# Altium PCB PCB1.PcbDoc
Units mm, origin at the board's own origin, x right, y up, seen from the top; angles counter-clockwise.
Board outline 87.63 x 54.23 mm, 2 copper layers (Top Layer, Bottom Layer); 26 components, 14 nets, 70 pads, 0 vias.
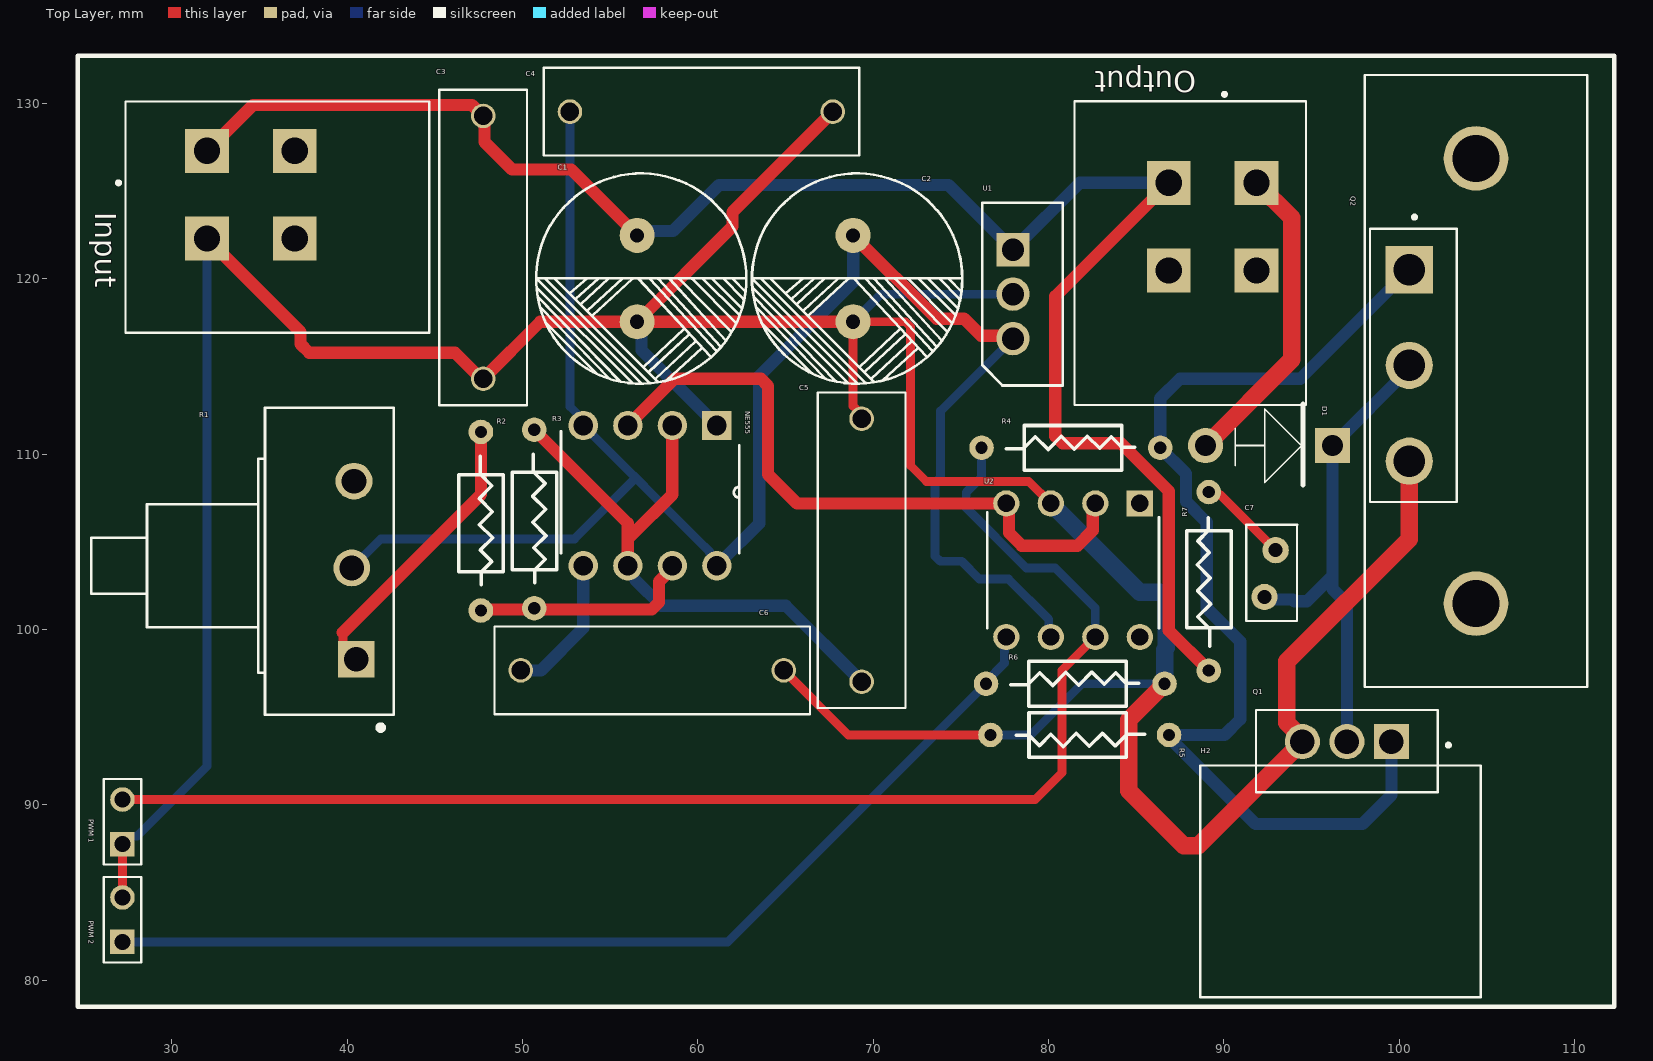
[diagram p0: Top Layer view]
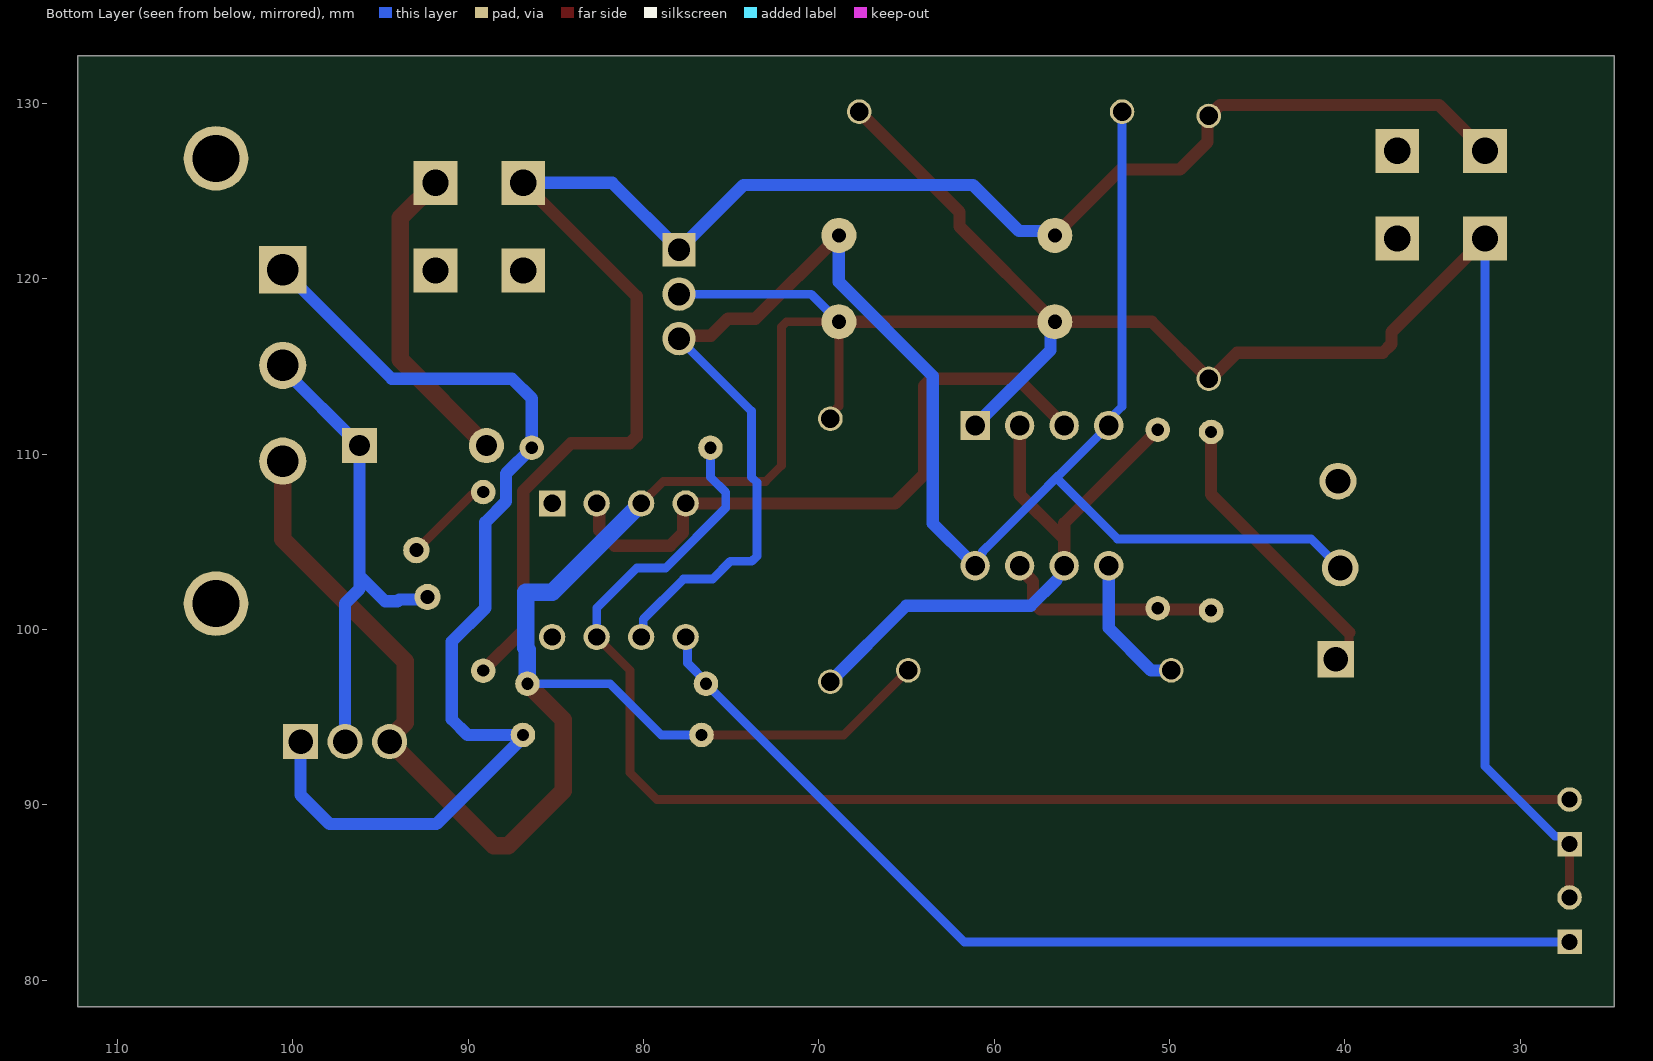
[diagram p1: Bottom Layer view, seen from below]
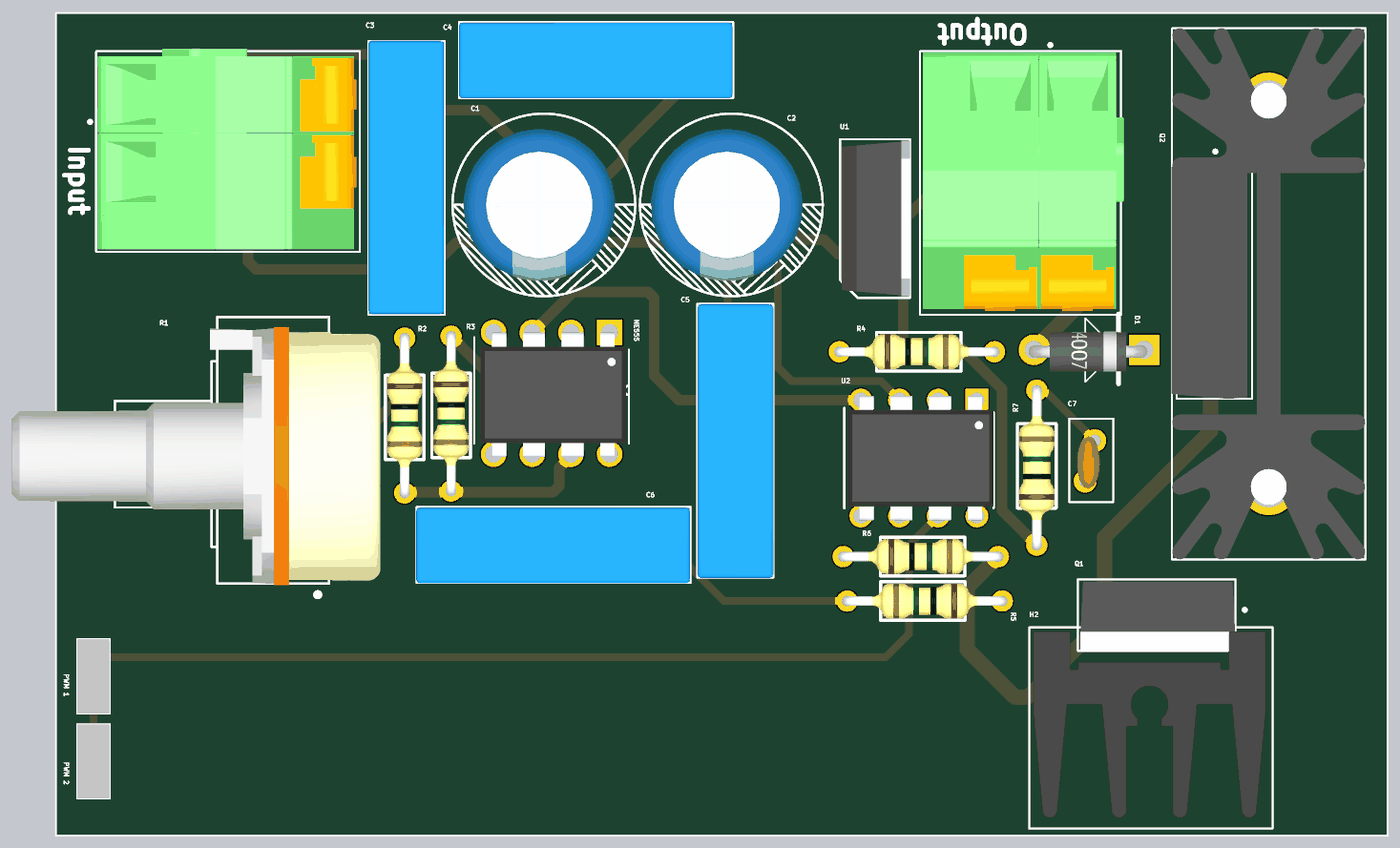
[diagram p2: 3D render of the assembled board from above, using the file's embedded part models]

## Layer stack, top to bottom
Top Solder: solder mask 0.0102, Solder Resist, Dk 3.5
Top Layer: signal copper 0.0356
Dielectric 1: dielectric 0.32, FR-4, Dk 4.8
Bottom Layer: signal copper 0.0356
Bottom Solder: solder mask 0.0102, Solder Resist, Dk 3.5

## Board outline
24.638,78.486 112.268,78.486 112.268,132.715 24.638,132.715

## Design rules (kind name [scope] priority, off if disabled: settings)
Clearance [All] p1: gap=0.254 ignorepadtopadclearanceinfootprint=FALSE except(0: Arc-Hole Track-Hole SMDPad-Hole THPad-Hole Via-Hole Fill-Hole Poly-Hole Region-Hole Text-Hole)
Height [All] p1: minheight=0 maxheight=40 prefheight=12.7
HoleSize [All] p1: absolutevalues=TRUE maxlimit=4 minlimit=0.025 maxpercent=80.000 minpercent=20.000
PolygonConnect [All] p1: connectstyle=Relief reliefconductorwidth=0.254 reliefentries=4 polygonreliefangle="90 Angle" airgapwidth=0.254
RoutingVias [All] p1: holewidth=0.711 width=1.27 viastyle="Through Hole" minholewidth=0.711 minwidth=1.27 maxholewidth=0.711 maxwidth=1.27
SilkToSilkClearance [All] p1: silktosilkclearance=0.1
SilkToSolderMaskClearance [IsPad] p1: minsilkscreentomaskgap=0.1 clearancetoexposedcopper=TRUE
SolderMaskExpansion [All] p1: expansion=0.102 istentingtop=FALSE
Width [All] p1: maxlimit=1 minlimit=0.254 preferedwidth=0.5
26 further rules are at their usual default settings.

## Components (designator, comment, footprint, x,y, rotation, side; value= is the part's Value field where it differs from the comment)
C1 "(DIGIKEY Part Number)" "Capacitor Aluminum Electrolytic DIP 10*13*5" 56.769,120.015 r270 top value="?uF, ?V"
C2 "(DIGIKEY Part Number)" "Capacitor Aluminum Electrolytic DIP 10*13*5" 69.088,120.015 r270 top value="?uF, ?V"
C3 "(DIGIKEY Part Number)" "Capacitor Film DIP 01" 47.752,121.793 r90 top value="?uF, ?V"
C4 "(DIGIKEY Part Number)" "Capacitor Film DIP 01" 60.205,129.54 r180 top value="?uF, ?V"
C5 "(DIGIKEY Part Number)" "Capacitor Film DIP 01" 69.342,104.521 r270 top value="10 nF, 630V"
C6 "(DIGIKEY Part Number)" "Capacitor Film DIP 01" 57.404,97.663 r180 top value="1nF, 50V"
C7 "(DIGIKEY Part Number)" "Capacitor Ceramic Lens DIP" 92.647,103.188 r270 top value="?uF, ?V"
D1 "(DIGIKEY Part Number)" "Diode DIP DO-41 01" 92.583,110.49 r0 top
H1 "(DIGIKEY Part Number)" "HEATSINK 02" 104.394,114.173 r90 top
H2 "(DIGIKEY Part Number)" "HEATSINK 05" 89.535,90.17 r0 top
Input "(DIGIKEY Part Number)" "Phoenix Contact 2x2 Male Straight"#1 35.829,121.626 r180 top
NE555 "NE555N" "NE555 DIP-8" 61.087,111.633 r270 top
Output "(DIGIKEY Part Number)" "Phoenix Contact 2x2 Male Straight"#2 86.193,121.651 r90 top
"PWM 1" "(DIGIKEY Part Number)" "Header 01 1x2" 27.178,89.027 r180 top
"PWM 2" "(DIGIKEY Part Number)" "Header 01 1x2" 27.178,83.439 r180 top
Q1 "(DIGIKEY Part Number)" "MOSFET DIP TO-220" 97.028,93.599 r180 top
Q2 "(DIGIKEY Part Number)" "MOSFET DIP TO-247" 100.584,120.522 r270 top
R1 "(DIGIKEY Part Number)" "Resistor Variable DIP 03" 40.513,104.648 r90 top value=20K
R2 "(DIGIKEY Part Number)" "Resistor DIP 0.25W 01" 47.625,106.172 r270 top value="1 K"
R3 "(DIGIKEY Part Number)" "Resistor DIP 0.25W 01" 50.673,106.299 r270 top value="1 K"
R4 "(DIGIKEY Part Number)" "Resistor DIP 0.25W 01" 81.28,110.363 r0 top value=10
R5 "(DIGIKEY Part Number)" "Resistor DIP 0.25W 01" 81.788,93.98 r180 top value="10 K"
R6 "(DIGIKEY Part Number)" "Resistor DIP 0.25W 01" 81.534,96.901 r0 top value=10
R7 "(DIGIKEY Part Number)" "Resistor DIP 0.25W 01" 89.154,102.743 r90 top value="10 K"
U1 "(DIGIKEY Part Number)" "Linear Regulator DIP TO-220-3" 79.07,116.586 r270 top
U2 "TC4428AEPA-ND" "Gate Driver TC4428AEPA DIP 01" 77.597,99.568 r270 top

## Footprints (in the part's own frame and the unit in brackets; to place one, negate y for a bottom-side part, rotate by r counter-clockwise, add the part's x,y. Pads: shape width x height; smd on the part's side, far side on the other; paste and mask are expansions set on the pad)
"Capacitor Aluminum Electrolytic DIP 10*13*5" [mm]
  round 2 hole 0.8: 1(-2.464,-0.229) 2(2.464,-0.229)
  silkscreen extent -6,-6 6,6, body extent -5,-5.3 5,4.7, height 13
"Capacitor Ceramic Lens DIP" [mm]
  round 1.5 hole 0.8: 1(-1.333,0.317) 2(1.333,-0.317)
  silkscreen extent -2.79,-1.36 2.71,1.54, body extent -1.66,-0.85 1.84,0.65, height 4.5
"Capacitor Film DIP 01" [mm]
  round 1.4 hole 1.05: 1(-7.5,0) 2(7.5,0)
  silkscreen extent -9,-2.5 9,2.5, body extent -8.98,-2.48 9.02,2.52, height 10.5
"Diode DIP DO-41 01" [mm]
  round 2 hole 1.2: 1(-3.619,0)
  rect 2x2 hole 1.2: 2(3.619,0)
  silkscreen extent -1.92,-2.24 1.94,2.36, body extent -3.96,-1.43 3.84,1.19, height 3.81
"Gate Driver TC4428AEPA DIP 01" [mil]
  rect 59x59 hole 39: 1(-300,300)
  round 59 hole 39: 2(-300,200) 3(-300,100) 4(-300,0) 5(0,0) 6(0,100) 7(0,200) 8(0,300)
  silkscreen extent -280,-43 -20,343, body extent -311,-34 12,343, height 200
"Header 01 1x2" [mm]
  rect 1.398x1.398 hole 0.89: 1(0,1.27)
  round 1.398 hole 0.89: 2(0,-1.27)
  silkscreen extent -1.07,-2.44 1.07,2.44, body extent -1.07,-2.44 1.06,2.44, height 11.08
"HEATSINK 02" [mm]
  round 3.686 hole 2.67: 1(-12.7,0) 2(12.7,0)
  silkscreen extent -17.46,-6.35 17.46,6.35, body extent -17.46,-6.35 17.46,6.35, height 38.1
"HEATSINK 05" [mm]
  silkscreen extent -0.87,-11.15 15.12,2.07, body extent -0.63,-10.45 14.67,1.81, height 25
"Linear Regulator DIP TO-220-3" [mil]
  rect 75x75 hole 50: 1(-200,-43)
  round 75 hole 50: 2(-100,-43) 3(0,-43)
  silkscreen extent -305,-112 105,69, body extent -301,-108 101,69, height 775
"MOSFET DIP TO-220" [mm]
  rect 2x2 hole 1.4: 1(-2.54,0)
  round 2 hole 1.4: 2(0,0) 3(2.54,0)
  silkscreen extent -5.89,-1.81 5.18,2.89, body extent -5.16,-1.63 5,2.92, height 19.65
"MOSFET DIP TO-247" [mm]
  rect 2.69x2.69 hole 1.79: 1(0,0)
  round 2.69 hole 1.79: 2(5.46,0) 3(10.92,0)
  silkscreen extent -3.1,-2.23 13.25,2.71, body extent -2.34,-2.59 13.26,2.41, height 30.1
"NE555 DIP-8" [mil]
  rect 66x66 / inner round 66 / far side rect 66x66 hole 44: 1(0,0)
  round 66 hole 44: 2(0,-100) 3(0,-200) 4(0,-300) 5(314.96,-300) 6(314.96,-200) 7(314.96,-100) 8(314.96,0)
  silkscreen extent 13,-350 287,50, body extent 0,-334 323,43, height 200
"Phoenix Contact 2x2 Male Straight"#1 [mm]
  rect 2.5x2.5 hole 1.5: 1(-1.175,-5.675) 1(3.825,-5.675) 2(-1.175,-0.675) 2(3.825,-0.675)
  silkscreen extent -8.85,-8.5 8.97,4.7, body extent -8.62,-8.67 8.37,4.53, height 16.49
"Phoenix Contact 2x2 Male Straight"#2 [mm]
  rect 2.5x2.5 hole 1.5: 1(3.825,-5.675) 2(3.825,-0.675) ""(-1.175,-0.675) ""(-1.175,-5.675)
  silkscreen extent -8.85,-8.5 8.97,4.7, body extent -8.62,-8.67 8.37,4.53, height 16.49
"Resistor DIP 0.25W 01" [mm]
  round 1.4 hole 0.7: 1(-5.093,0) 2(5.093,0)
  silkscreen extent -3.7,-1.27 3.63,1.27, body extent -5.4,-1.16 5.37,1.16, height 2.93
"Resistor Variable DIP 03" [mm]
  rect 2.1x2.1 hole 1.4: 1(-6.35,0)
  round 2.1 hole 1.4: 2(-1.143,0.254) 3(3.81,0.127)
  silkscreen extent -10.4,-2.15 8,15.11, body extent -9.64,-5.52 7.35,18.68, height 21.3

## Part data
C1 C2: library part "Capacitors Electrolytic", "Aluminum Electrolytic Capacitors", Package="Radial Nichicon", Supplier Part Number 1=1189-2012-ND, Availability=Unavailable, MF=Nichicon, MP=UVR2A471MHD, Price=None, SnapEDA_Link=https://www.snapeda.com/parts/UVR2A471MHD/Nichicon/view-part/2302933/?ref=snap, Supplier 1=Digi-Key
C3 C4 C5 C6 C7: library part "Capacitors Non-Electrolytic", "Ceramic & Polyester Capacitor"
D1: library part Diode, "Through Hole & SMD Diode", ComponentLink1Description="Manufacturer Link", ComponentLink1URL=http://www.irf.com/, DatasheetVersion=Aug-1984, LatestRevisionDate=17-Jul-2002, LatestRevisionNote="Re-released for DXP Platform.", PackageDescription="Diode, Axial; Body 9.5 x 5.3 mm (LxDia. max), Lead Dia. 1.32 mm (max)", PackageReference=DO-201AD, Published=8-Jun-2000, Publisher="Altium Limited"
H1 H2: library part "Heat Sink", "Heat Sink TO-220 Aluminum 20.0W @ 60Â°C Board Level, Vertical", Package=None, Availability="In Stock", Check_prices=https://www.snapeda.com/parts/530002B02500G/Aavid+Thermalloy/view-part/?ref=eda, MF="Aavid Thermalloy", MP=530002B02500G, Price=None, Purchase-URL=https://pricing.snapeda.com/search/part/530002B02500G/?ref=eda, SnapEDA_Link=https://www.snapeda.com/parts/530002B02500G/Aavid+Thermalloy/view-part/?ref=snap
Input Output "PWM 1" "PWM 2": library part "Contact-Phoenix 2x", "Contact-Phoenix 2x", Color=Green, Current=15A, Current Rating=17.5A, Flammability Rating="UL94 V-0", Manufacturer="Phoenix Contact", Manufacturer Part Number=1715721, Max Current Rating=22A, Max Operating Temperature=100°C, Max Supply Voltage=250V, Min Operating Temperature=-20°C, Package Quantity=50, Supplier Part Number 1=277-1263-ND, Test Voltage=4kV, Voltage=300V, Voltage Rating=400V, Approvals=UL,CSA,cULus,EAC, Category="Terminal Blocks", ComponentLink1Description=https://datasheet.ciiva.com/16046/1715721-16046034.pdf?src-supplier=Onlinecomponents.com, ComponentLink1URL=https://datasheet.ciiva.com/16046/1715721-16046034.pdf?src-supplier=Onlinecomponents.com, ComponentLink2Description=https://datasheet.ciiva.com/1120/1697161-1120393.pdf?src-supplier=Farnell, ComponentLink2URL=https://datasheet.ciiva.com/1120/1697161-1120393.pdf?src-supplier=Farnell, ComponentLink3Description=https://datasheet.ciiva.com/15169/getdatasheetpartid-212174-15169929.pdf?src-supplier=Verical, ComponentLink3URL=https://datasheet.ciiva.com/15169/getdatasheetpartid-212174-15169929.pdf?src-supplier=Verical, ComponentLink4Description=https://datasheet.ciiva.com/832/1715721-832095.pdf?src-supplier=Digi-Key, ComponentLink4URL=https://datasheet.ciiva.com/832/1715721-832095.pdf?src-supplier=Digi-Key, Connector Type="Screw,Terminal Block,PCB", Contact Material=Tin, Depth=9.8mm, Height=17.3mm, Housing Color=Green, Housing Material=Polyamide, Insulation Material=Nylon, Lead Free="Lead Free", Length=10.16mm, Mount="Through Hole", Number of Circuits=2, Number of Contacts=2, Number of Levels=1, Number of Pins=2, Number of Poles=2, Number of Positions=2, Number of Positions Per Level=2, Number of Rows=1, Orientation=Straight, Packaging=Bulk, Pitch=5.08mm, Pricing 1="1=1.39000, 10=1.33400, 50=1.27600, 100=1.24120, 250=1.16000, 500=1.06720, 1000=0.98600, 2500=0.93960, 5000=0.89320 (USD)", Radiation Hardening=No, REACH SVHC="No SVHC", RoHS=Yes, RoHS Compliant=Yes, Series=MKDS, Stock 1=4962, Stripping Length=7mm, Supplier 1=Digi-Key, Termination=Screw, Voltage Rating (AC)=250V, Weight=0.103705oz, Width=17.3mm, Wire Gauge (Max)=26AWG, Wire Gauge (Min)=26AWG, Wire/Cable Gauge=14AWG
NE555: "555 Type, Timer/Oscillator (Single) IC 500kHz 8-DIP", Package="DIP-8 STMicroelectronics", Availability="In Stock", Check_prices=https://www.snapeda.com/parts/NE555N/STMicroelectronics/view-part/?ref=eda, MF=STMicroelectronics, MP=NE555N, Price=None, Purchase-URL=https://pricing.snapeda.com/search/part/NE555N/?ref=eda, SnapEDA_Link=https://www.snapeda.com/parts/NE555N/STMicroelectronics/view-part/?ref=snap
Q1 Q2: library part "Transistor MOSFET", "N-Channel MOSFET", Package="SC-59 ON Semiconductor", Availability=Good, Check_prices=https://www.snapeda.com/parts/FDN360P/ON%20Semiconductor/view-part/2105995/?ref=eda, MF="ON Semiconductor", MP=FDN360P, Price=None, Purchase-URL=https://pricing.snapeda.com/search/part/FDN360P/?ref=eda, SnapEDA_Link=https://www.snapeda.com/parts/FDN360P/ON%20Semiconductor/view-part/2105995/?ref=snap
R1: library part "Resistor Variable", "Trimmer Potentiometer Cermet Top Adjustment", Supplier Part Number 1=3252W-103LF-ND, LatestRevisionDate=17-Jul-2002, LatestRevisionNote="Re-released for DXP Platform.", PackageDescription="Axial Device, Thru-Hole; 2 Leads; 0.7 in Pin Spacing", PackageReference=AXIAL-0.7, Published=8-Jun-2000, Publisher="Altium Limited", Set Position=0.5, Supplier 1=Digi-Key
R2 R3 R4 R5 R6 R7: library part Resistor, "Through Hole & SMD", LatestRevisionDate=17-Jul-2002, LatestRevisionNote="Re-released for DXP Platform.", PackageDescription="Axial Device, Thru-Hole; 2 Leads; 0.3 in Pin Spacing", PackageReference=AXIAL-0.3, Published=8-Jun-2000, Publisher="Altium Limited"
U1: library part "Linear Regulator", "Voltage Regulators - Linear, Low Drop Out (LDO) Regulators", Case/Package=TO-252, Dropout Voltage=1.1V, Input Bias Current=5mA, Manufacturer=STMicroelectronics, Manufacturer Part Number=LD1117DT33, Max Input Voltage=15V, Max Operating Temperature=125°C, Max Output Current=800mA, Max Output Voltage=3.3V, Max Power Dissipation=12W, Min Input Voltage=5.3V, Min Operating Temperature=0°C, Min Supply Voltage=4.75V, Output Current=950mA, Output Voltage Accuracy=1%, Package Quantity=75, Quiescent Current=10mA, Supplier Part Number 1=511-LD1117DT33, Category="Voltage Regulators - Linear", ComponentLink1Description=https://datasheet.ciiva.com/2070/cd00000544-2070990.pdf?src-supplier=Digi-Key, ComponentLink1URL=https://datasheet.ciiva.com/2070/cd00000544-2070990.pdf?src-supplier=Digi-Key, Max Supply Voltage=15V, Mount="Surface Mount", Nominal Output Voltage=3.3V, Number of Outputs=1, Number of Pins=3, Number of Regulators=1, Output Type=Fixed, Output Voltage=3.3V, Packaging=Rail/Tube, Polarity=Positive, Power Dissipation=12W, REACH SVHC="No SVHC", RoHS=Yes, RoHS Compliant=Yes, Supplier 1=Mouser, Termination=SMD/SMT, Voltage=3.3V
U2: library part "Gate Driver TC4428CPA", "Low-Side Gate Driver IC Inverting, Non-Inverting 8-PDIP", Package="DIP-8 Microchip", Digi-Key_Part_Number=TC4428CPA-ND, MF=Microchip, MP=TC4428CPA, SnapEDA_Link=https://www.snapeda.com/parts/TC4428CPA/Microchip/view-part/442163/?ref=snap

## Nets (pads, with @x,y where several pads share a name; then routed paths per layer and width w, separated by ;. In a path a pad name is that pad's centre, name@x,y a point inside that pad or via, vN(x,y) a via of type N, cw(c..) or ccw(c..) an arc to the next point about the centre after c; other vN are vias at no path point)
Gate: Q1.1 Q2.1 R4.2 R5.1 | length 60.5
  Bottom Layer w0.7: Q1.1 99.568,90.551 97.917,88.9 91.821,88.9 86.881,93.84 R5.1 90.043,93.98 90.94,94.877 90.94,99.306 89.027,101.219 89.027,106.119 87.85,107.296 87.85,108.886 R4.2 86.373,113.17 87.503,114.3 94.362,114.3 Q2.1
GND: "PWM 1.1" "PWM 2.2" C1.2 C2.2 C3.1 C4.1 C5.1 C6.1 Input.2@32.004,122.301 NE555.1 Q1.3 Q2.3 R5.2 R6.2 U1.2 U2.3 | length 220.2
  Top Layer w0.5: 27.178,84.709 27.178,87.757 ; C6.1 68.587,93.98 R5.2 ; C5.1 69.342,112.265 68.859,112.747 C2.2 71.843,117.551 72.136,117.258 72.136,109.347 73.042,108.441 78.884,108.441 U2.3
  Top Layer w0.7: Input.2@32.004,122.301 37.338,116.967 37.338,116.283 37.837,115.784 46.153,115.784 C3.1@47.644,114.293 ; C3.1 51.01,117.551 C1.2 ; C4.1 61.976,123.811 61.976,122.987 C1.2 ; C2.2 C1.2
  Top Layer w1: C3.1@47.644,114.293 C3.1 ; R6.2 84.582,94.856 84.582,90.805 87.724,87.663 88.552,87.663 Q1.3 94.488,93.796 93.599,94.685 93.599,98.171 100.584,105.156 Q2.3
  Bottom Layer w0.5: 27.088,87.667 27.178,87.757 27.627,88.206 28.008,88.206 32.004,92.202 Input.2@32.004,122.301 ; C2.2 70.434,119.126 U1.2 ; R5.2 78.994,93.98 81.915,96.901 R6.2
  Bottom Layer w0.7: C1.2 56.789,117.302 56.789,115.931 NE555.1
  Bottom Layer w1: U2.3 85.217,102.108 86.72,102.108 86.72,98.945 86.627,98.852 R6.2
Input: C1.1 C3.2 Input.1@32.004,127.301 Output.2 R7.1 U1.1 | length 100.2
  Top Layer w0.7: Input.1@32.004,127.301 34.624,129.921 47.124,129.921 C3.2 ; C3.2@47.829,129.216 47.829,127.812 49.403,126.238 52.781,126.238 C1.1 ; Output.2 80.391,118.999 80.391,111.027 80.801,110.617 84.141,110.617 86.868,107.89 86.868,99.936 R7.1
  Top Layer w1: C3.2 C3.2@47.829,129.216
  Bottom Layer w0.7: C1.1 56.787,122.725 58.59,122.725 61.214,125.349 74.295,125.349 U1.1 81.788,125.476 Output.2
NetC5_2: C5.2 NE555.2 NE555.6 R3.1 | length 33
  Top Layer w0.7: R3.1 56.007,106.058 NE555.6 ; 56.194,105.343 58.547,107.696 NE555.2 ; C5.2@69.208,97.155 C5.2
  Bottom Layer w0.7: 56.451,102.807 57.912,101.346 65.017,101.346 C5.2 C5.2@69.571,96.792
NetC6_2: C6.2 NE555.5 | length 8.1
  Bottom Layer w0.7: C6.2 51.054,97.663 53.467,100.076 NE555.5
NetC7_1: C7.1 R7.2 | length 5.2
  Top Layer w0.5: R7.2 89.326,107.663 89.822,107.663 C7.1
NetC7_2: C7.2 D1.2 Q1.2 Q2.2 | length 28.2
  Bottom Layer w0.7: C7.2 92.482,101.701 93.941,101.701 94.042,101.6 94.742,101.6 96.203,103.06 ; Q1.2 97.028,101.483 96.203,102.308 96.203,103.06 ; Q2.2 100.584,114.871 D1.2 96.203,103.06
NetD1_1: D1.1 Output.1 | length 17.8
  Top Layer w1: D1.1 93.872,115.399 93.872,123.472 Output.1
NetNE555_7: NE555.7 R2.2 R3.2 | length 12.8
  Top Layer w0.7: R2.2 47.688,101.143 R3.2@50.609,101.143 ; R3.2 R3.2@50.609,101.143 ; NE555.7 58.547,103.497 57.785,102.735 57.785,101.553 57.375,101.143 R3.2@50.609,101.143
"NetPWM 1_2": "PWM 1.2" R4.1 U2.7 | length 77.9
  Top Layer w0.5: 27.178,90.297 79.248,90.297 80.772,91.821 80.772,97.663 U2.7
  Bottom Layer w0.5: R4.1 76.187,108.699 75.311,107.823 75.311,106.934 78.74,103.505 80.391,103.505 82.677,101.219 U2.7
"NetPWM 2_1": "PWM 2.1" R6.1 U2.5 | length 58.5
  Bottom Layer w0.5: 27.178,82.169 61.709,82.169 R6.1 76.441,97.022 77.488,98.069 77.488,99.459 U2.5
NetR1_1: R1.1 R2.1 | length 16.5
  Top Layer w0.5: 39.751,99.83 39.751,99.06 R1.1
  Top Layer w0.7: 39.751,99.83 47.625,107.704 R2.1
Out: NE555.3 U2.2 U2.4 | length 37.4
  Top Layer w0.7: NE555.3 58.674,114.3 63.598,114.3 64.008,113.89 64.008,108.839 65.659,107.188 U2.4 77.75,107.035 77.75,105.511 78.486,104.775 81.661,104.775 82.524,105.638 82.524,107.035 U2.2
VCC: C2.1 C4.2 NE555.4 NE555.8 R1.2 U1.3 U2.6 | length 104.2
  Top Layer w0.7: C2.1 73.609,117.729 75.184,117.729 76.154,116.759 U1.3@77.805,116.759
  Top Layer w1: U1.3@77.805,116.759 U1.3
  Bottom Layer w0.5: R1.2 41.91,105.156 52.959,105.156 56.451,108.648 ; C4.2 52.705,112.713 53.467,111.951 NE555.4 54.102,110.998 56.093,109.007 56.451,108.648 ; NE555.8@61.312,103.858 61.18,103.858 60.659,104.379 60.659,104.451 60.366,104.744 60.356,104.744 58.039,107.061 57.531,107.569 56.451,108.648 ; U1.3 73.845,112.453 73.845,108.689 73.533,108.378 73.533,104.179 73.826,103.886 75.057,103.886 76.073,102.87 77.724,102.87 80.021,100.573 80.021,99.684 U2.6
  Bottom Layer w0.7: NE555.8@61.312,103.858 63.5,106.046 63.5,114.46 68.859,119.82 C2.1
pads on no net: H1.1 H1.2 Input.1@37.004,127.301 Input.2@37.004,122.301 Output. R1.3 U2.1 U2.8

## Silkscreen, mask and mechanical layers (free items; w line width, h text height)
Top Overlay:
  lines w0.254: 24.638,78.486 24.638,132.715 25.273,132.715 112.268,132.715 112.268,78.486 24.638,78.486